# EAGLE board coyoho-spoeka (EAGLE 5.10)
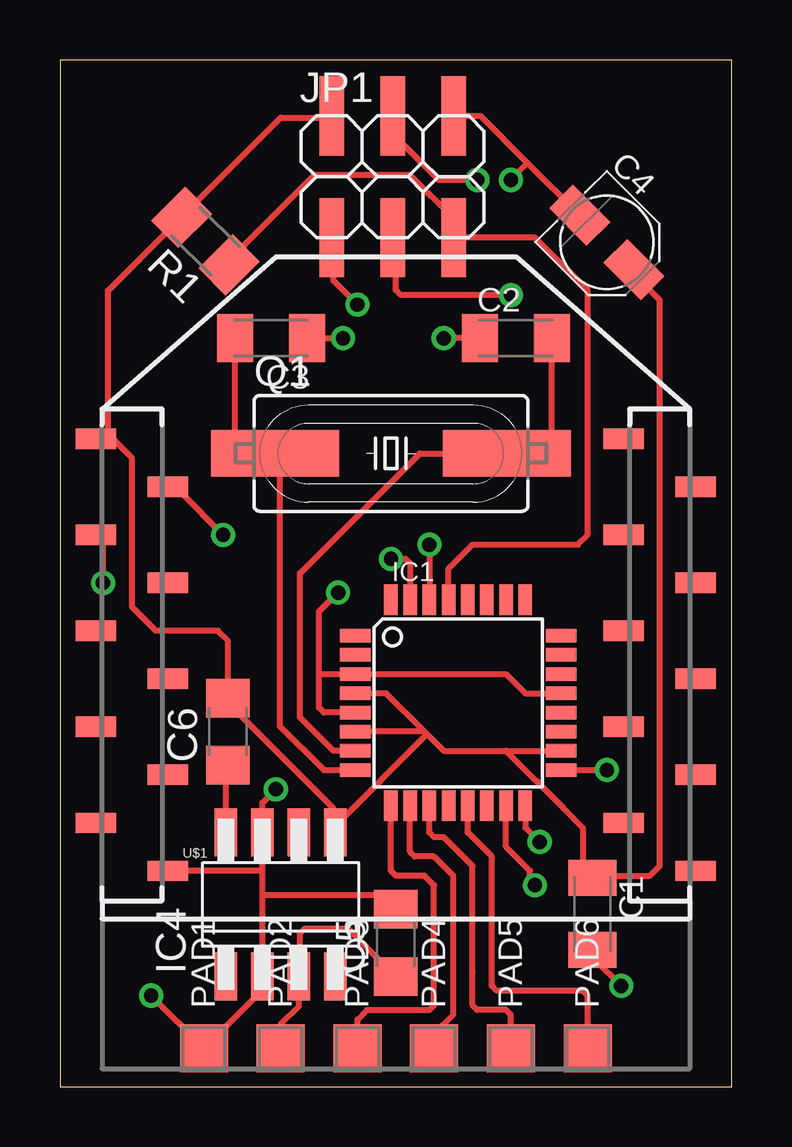
[diagram p0: board, top side]
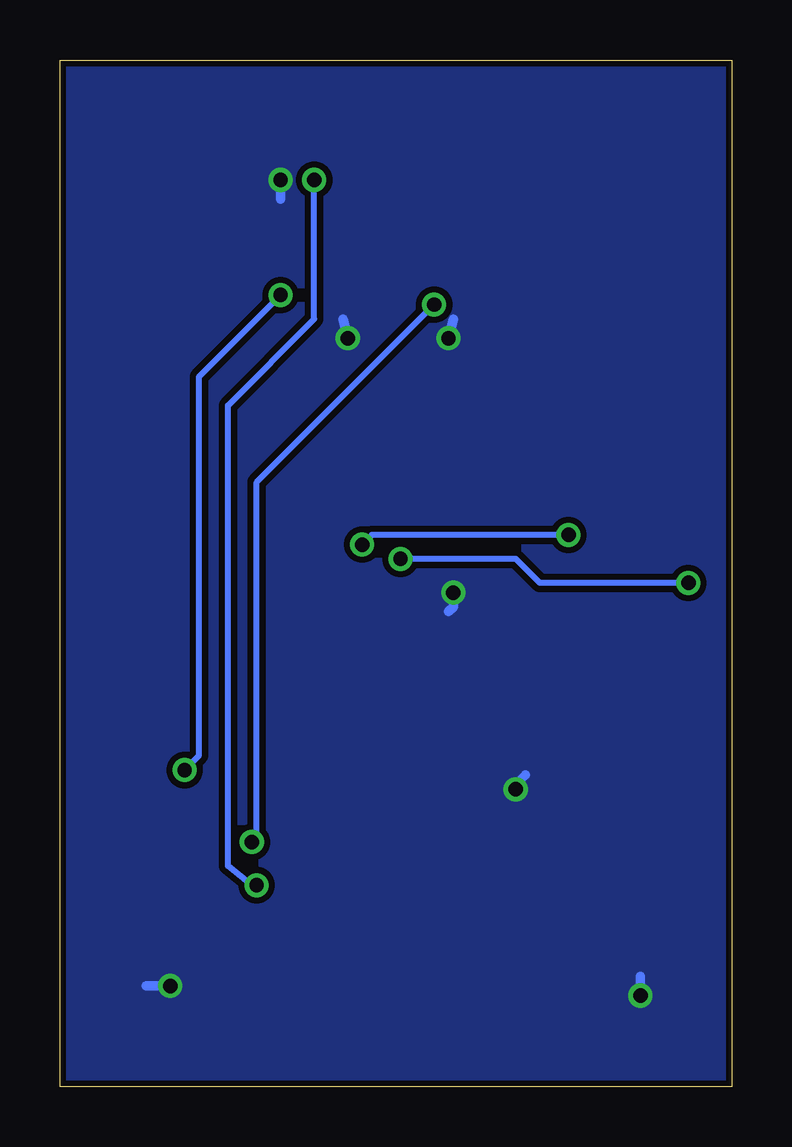
[diagram p1: board, bottom side, seen from below]

Size 28 x 42.8 mm. Coordinates in mm from the lower left corner, seen from the top.
Outline: 0,0 28,0 28,42.8 0,42.8 0,0
Copper layers (1*16): Top 0.035mm / dielectric 1.5mm / Bottom 0.035mm
Design rules "default *": minimum track width 10mil, minimum drill 16mil, track to track 8mil, track to pad 8mil, pad to pad 8mil, via to via 8mil, smd to smd 8mil, copper to edge 10mil, drill to drill 8mil, minimum pad ring 10mil, minimum via ring 8mil, stop-mask expansion 8mil, vias tented up to drill 0mil, thermal gap 10mil

## Footprints (pad centres in the part's own frame; a part is rotated, then mirrored left to right if it is on the bottom)
C1206K = smd 1.5 x 2: 1 -1.5,0; 2 1.5,0
PANASONIC_B = smd 2.2 x 1.4: + 1.6,0; - -1.6,0
C1206 = smd 1.6 x 1.8: 1 -1.4,0; 2 1.4,0
TQFP32-08 = smd 1.27 x 0.559: 1 -4.293,2.8; 2 -4.293,2; 3 -4.293,1.2; 4 -4.293,0.4; 5 -4.293,-0.4; 6 -4.293,-1.2; 7 -4.293,-2; 8 -4.293,-2.8; 17 4.293,-2.8; 18 4.293,-2; 19 4.293,-1.2; 20 4.293,-0.4; 21 4.293,0.4; 22 4.293,1.2; 23 4.293,2; 24 4.293,2.8 | smd 0.559 x 1.27: 9 -2.8,-4.293; 10 -2,-4.293; 11 -1.2,-4.293; 12 -0.4,-4.293; 13 0.4,-4.293; 14 1.2,-4.293; 15 2,-4.293; 16 2.8,-4.293; 25 2.8,4.293; 26 2,4.293; 27 1.2,4.293; 28 0.4,4.293; 29 -0.4,4.293; 30 -1.2,4.293; 31 -2,4.293; 32 -2.8,4.293
SM8 = smd 0.95 x 2: 1 -2.28,-3; 2 -0.76,-3; 3 0.76,-3; 4 2.28,-3; 5 2.28,3; 6 0.76,3; 7 -0.76,3; 8 -2.28,3
2X03SMD = smd 1.016 x 3.302: 1 -1.27,-3.81; 2 -1.27,1.27; 3 1.27,-3.81; 4 1.27,1.27; 5 3.81,-3.81; 6 3.81,1.27
SMD20S = smd 2 x 2: PAD 0,0
HC49UP = smd 5.334 x 1.93: 1 -4.826,0; 2 4.826,0
M1206 = smd 1.6 x 2: 1 -1.4,0; 2 1.4,0
XBEE-PRO-SMD = smd 1.7 x 0.85: 1 -12.5,20; 2 -9.5,18; 3 -12.5,16; 4 -9.5,14; 5 -12.5,12; 6 -9.5,10; 7 -12.5,8; 8 -9.5,6; 9 -12.5,4; 10 -9.5,2; 11 12.5,2; 12 9.5,4; 13 12.5,6; 14 9.5,8; 15 12.5,10; 16 9.5,12; 17 12.5,14; 18 9.5,16; 19 12.5,18; 20 9.5,20

## Placement (x,y rotation side)
C1  100n  [C1206K]  22.2,7.2 270 top
C2  22p  [C1206K]  19,31.2 0 top
C3  22p  [C1206K]  8.8,31.2 180 top
C4  1u/16V  [PANASONIC_B]  22.8,35.2 315 top
C5  100n  [C1206]  14,6 90 top
C6  10p  [C1206]  7,14.8 90 top
IC1  ATMEGA168  [TQFP32-08]  16.6,16 0 top
IC4  ZLDO330  [SM8]  9.2,7.6 0 top
JP1  [2X03SMD]  12.6,39.2 0 top
PAD1  PAD-SMD20S  [SMD20S]  6,1.6 90 top
PAD2  PAD-SMD20S  [SMD20S]  9.2,1.6 90 top
PAD3  PAD-SMD20S  [SMD20S]  12.4,1.6 90 top
PAD4  PAD-SMD20S  [SMD20S]  15.6,1.6 90 top
PAD5  PAD-SMD20S  [SMD20S]  18.8,1.6 90 top
PAD6  PAD-SMD20S  [SMD20S]  22,1.6 90 top
Q1  16MHz  [HC49UP]  13.8,26.4 0 top
R1  10k  [M1206]  6.06,35.25 135 top
U$1  XBee  [XBEE-PRO-SMD]  14,7 0 top

## Library data of the parts
C1-C6 R1 = rcl
IC1 = atmega8
IC4 U$1 = grapelabs
JP1 = pinhead-1
PAD1-PAD6 = dpads
Q1 = crystal

## Nets
+3V3: C1.1 C4.+ C6.2 IC1.4 IC1.6 IC1.18 IC4.5 JP1.2 R1.2 U$1.1
BUTTON: IC1.11 PAD5.PAD
GND: C1.2 C2.1 C3.1 C4.- C5.2 IC1.3 IC1.5 IC1.21 IC4.2 IC4.7 JP1.6 PAD1.PAD U$1.10
LED_BLUE: IC1.13 PAD6.PAD
LED_GREEN: IC1.10 PAD4.PAD
LED_RED: IC1.9 PAD3.PAD
MISO: IC1.16 JP1.1
MOSI: IC1.15 JP1.4
N$3: C2.2 IC1.7 Q1.2
N$4: C3.2 IC1.8 Q1.1
N$15: C6.1 IC4.8
POW: C5.1 IC4.3 PAD2.PAD
RESET: IC1.29 JP1.5 R1.1
RXD: IC1.30 U$1.2
SCK: IC1.17 JP1.3
TXD: IC1.31 U$1.3

## Tracks (layer width: path | path; a pad name or v marks a point on that pad's centre or on a via)
+3V3
  Top 0.254: 15.2,14.8 IC1.6 | 15.3,14.7 15.2,14.8 | 18.6,14 16,14 15.3,14.7 | 18.6,14 IC1.18 | 11.48,10.88 15.3,14.7 | IC1.4 13.6,16.4 15.2,14.8 | 7,16 11.4,11.6 11.4,10.68 | 18.6,14 21,11.6 21.8,10.8 21.8,9.1 C1.1 | C6.2 7,18.6 6.6,19 4,19 3,20 3,26.2 2,27.2 2,33.2 2.03,33.2 R1.2 | 23.93,33.87 25,32.8 25,9.4 25,9.2 24.6,8.8 22.3,8.8 | 5.07,36.27 9.2,40.4 11.26,40.4
  Top 0.4: 11.48,10.88 IC4.5 11.4,10.68 | C6.2 7,16 | U$1.1 1.8,27 2,27.2 | 23.93,33.87 C4.+ | R1.2 5.07,36.27 | C1.1 22.3,8.8 | 11.26,40.4 JP1.2 11.26,40.4
BUTTON
  Top 0.254: IC1.11 15.4,10.6 15.6,10.4 16,10.4 17.2,9.2 17.2,4.8 17.2,3.4 17.4,3.2 18.6,3.2 18.8,3 PAD5.PAD
GND  (via drill 0.6)
  Top 0.254: 8.44,4.04 PAD1.PAD v3.8,3.8 | IC4.2 8.44,7.8 | 8.44,7.8 8.44,8 | 8.44,8 8.44,9 | 8.44,9 IC4.7 8.44,11.84 v9,12.4 | 8.44,9 U$1.10 | IC1.5 11,15.6 10.8,15.8 10.8,17 10.8,17.2 | IC1.21 19.4,16.4 18.6,17.2 IC1.3 10.8,17.2 | 8.44,7.8 8.44,8 | 8.44,8 14,8 | JP1.6 17.53,40.47 19.47,38.53 | 19.47,38.53 C4.- | C2.1 v16,31.2 | C3.1 v11.8,31.2 | 10.8,17.2 10.8,19.8 v11.6,20.6 | 22.3,5.3 v23.4,4.2 | 19.47,38.53 19.47,38.47 v18.8,37.8
  Top 0.4: 8.44,4.04 IC4.2 | 14,8 C5.2 | C4.- 21.53,36.33 | C2.1 17.8,31.3 | C1.2 22.3,5.3
  Bottom 0.4: v16,31.2 16.2,32 | v11.8,31.2 11.6,32 | v3.8,3.8 3.8,4.6 | v9,12.4 9,12.6 8.6,13 | v11.6,20.6 11.6,20 11.8,19.8 | v23.4,4.2 24.4,4.2 | v18.8,37.8 18.8,37
  pour Bottom (isolate 0.254): -0.2,-0.2 -0.2,43 28.2,43 28.2,-0.2
LED_BLUE
  Top 0.254: IC1.13 17,10.6 18,9.6 18,7.2 18,4.2 18.2,4 21.8,4 22,3.8 PAD6.PAD
LED_GREEN
  Top 0.254: IC1.10 14.6,9.8 14.8,9.6 15.6,9.6 16.4,8.8 16.4,3 15.6,2.2 PAD4.PAD
LED_RED
  Top 0.254: IC1.9 13.8,9 14,8.8 15.2,8.8 15.6,8.4 15.6,3.4 15.4,3.2 12.8,3.2 12.4,2.8 PAD3.PAD
MISO  (via drill 0.6)
  Top 0.254: IC1.16 19.4,10.8 v20,10.2 | v12.4,32.6 11.4,33.6 11.4,35.32
  Top 0.4: 11.4,35.32 JP1.1
  Bottom 0.254: v12.4,32.6 19.8,25.2 19.8,10.4 v20,10.2
MOSI  (via drill 0.6)
  Top 0.254: IC1.15 18.6,10 19.6,9 19.6,8.6 v19.8,8.4 | v17.4,37.8 15.8,37.8 13.8,39.8
  Top 0.4: 14,40.34 JP1.4 13.8,40.4 13.8,39.8 13.8,39.6
  Bottom 0.254: 20,8.4 21,9.2 21,28.4 17.4,32 v17.4,37.8
  Bottom 0.4: v19.8,8.4 20,8.4
N$3
  Top 0.254: IC1.7 11.4,14 10,15.4 10,21.4 15,26.4 Q1.2 | 20.5,26.4 C2.2
  Top 0.4: Q1.2 20.5,26.4
N$4
  Top 0.254: IC1.8 11,13.2 9.17,15.03 9.17,26.2 | 7.3,26.4 C3.2
  Top 0.4: 7.3,26.4 Q1.1 9.17,26.2
N$15
  Top 0.254: IC4.8 6.92,13.32
  Top 0.4: 6.92,13.32 C6.1
POW
  Top 0.254: IC4.3 9.96,3.36 9.2,2.6 PAD2.PAD | 13.6,5 12,6.6 10.2,6.6 10,6.4 10,4.64
  Top 0.4: 13.6,5 C5.1 | IC4.3 10,4.64
RESET
  Top 0.254: IC1.29 16.2,21.6 17.2,22.6 21.6,22.6 22,23 22,33.2 19.8,35.4 JP1.5 | 7.05,34.45 10.6,38 14.6,38 16.4,36.2
  Top 0.4: JP1.5 | 7.05,34.45 R1.1 | 16.2,35.8 16.2,35.6 JP1.5 | 16.4,36.2 JP1.5
RXD  (via drill 0.6)
  Top 0.254: IC1.30 15.4,21.6 v15.4,22.6 | 5,24.8 v6.8,23
  Top 0.4: 5,24.8 4.7,24.8 U$1.2
  Bottom 0.254: v6.8,23 15,23 v15.4,22.6
SCK  (via drill 0.6)
  Top 0.254: IC1.17 v22.8,13.2 | v18.8,33 14.2,33 14,33.2 14,35.26
  Top 0.4: 14,35.26 JP1.3
  Bottom 0.254: v18.8,33 22.2,29.6 22.2,13.8 v22.8,13.2
TXD  (via drill 0.6)
  Top 0.254: IC1.31 14.6,21.8 14.4,22 v13.8,22 | v1.8,21 1.8,22.7 U$1.3
  Bottom 0.254: v13.8,22 9,22 8,21 v1.8,21